# EAGLE board CT_schematic (EAGLE 7.6.0)

Size 100 x 80 mm. Coordinates in mm from the lower left corner, seen from the top.
Outline: 0,0 100,0 100,80 0,80 0,0
Copper layers (1*16): Top 0.035mm / dielectric 1.5mm / Bottom 0.035mm
Design rules "default": minimum track width 10mil, minimum drill 24mil, track to track 8mil, track to pad 8mil, pad to pad 8mil, via to via 8mil, smd to smd 8mil, copper to edge 40mil, drill to drill 8mil, minimum pad ring 10mil, minimum via ring 8mil, stop-mask expansion 4mil, vias tented up to drill 0mil, thermal gap 10mil

## Footprints (pad centres in the part's own frame; a part is rotated, then mirrored left to right if it is on the bottom)
C0603 = smd 0.8 x 0.8: 1 -0.762,0; 2 0.762,0
C0402 = smd 0.5 x 0.5: 1 -0.508,0; 2 0.508,0
C1210 = smd 1.2 x 2.5: 1 -1.524,0; 2 1.524,0
EXV-9H = smd 3.505 x 1.676: 1 -2.857,0; 2 2.857,0
L0603 = smd 0.8 x 0.8: 1 -0.762,0; 2 0.762,0
PJ-037B_PACKAGE = drill 3.7 square: 1 12,0 | drill 3.2 square: 2 6,0
R0603 = smd 0.8 x 0.8: 1 -0.762,0; 2 0.762,0
LQFP48 = smd 0.3 x 1.2: 1 -2.75,-4.25; 2 -2.25,-4.25; 3 -1.75,-4.25; 4 -1.25,-4.25; 5 -0.75,-4.25; 6 -0.25,-4.25; 7 0.25,-4.25; 8 0.75,-4.25; 9 1.25,-4.25; 10 1.75,-4.25; 11 2.25,-4.25; 12 2.75,-4.25; 25 2.75,4.25; 26 2.25,4.25; 27 1.75,4.25; 28 1.25,4.25; 29 0.75,4.25; 30 0.25,4.25; 31 -0.25,4.25; 32 -0.75,4.25; 33 -1.25,4.25; 34 -1.75,4.25; 35 -2.25,4.25; 36 -2.75,4.25 | smd 1.2 x 0.3: 13 4.25,-2.75; 14 4.25,-2.25; 15 4.25,-1.75; 16 4.25,-1.25; 17 4.25,-0.75; 18 4.25,-0.25; 19 4.25,0.25; 20 4.25,0.75; 21 4.25,1.25; 22 4.25,1.75; 23 4.25,2.25; 24 4.25,2.75; 37 -4.25,2.75; 38 -4.25,2.25; 39 -4.25,1.75; 40 -4.25,1.25; 41 -4.25,0.75; 42 -4.25,0.25; 43 -4.25,-0.25; 44 -4.25,-0.75; 45 -4.25,-1.25; 46 -4.25,-1.75; 47 -4.25,-2.25; 48 -4.25,-2.75
TST-110-05-T-D-RA = drill 1 pad 1.7 square: 1 0,0 | drill 1 pad 1.7: 2 0,2.54; 3 2.54,0; 4 2.54,2.54; 5 5.08,0; 6 5.08,2.54; 7 7.62,0; 8 7.62,2.54; 9 10.16,0; 10 10.16,2.54; 11 12.7,0; 12 12.7,2.54; 13 15.24,0; 14 15.24,2.54; 15 17.78,0; 16 17.78,2.54; 17 20.32,0; 18 20.32,2.54; 19 22.86,0; 20 22.86,2.54
AT24C02D = smd 1.6 x 0.6: 1 -2.475,1.905 | smd 1.55 x 0.6: 2 -2.475,0.635; 3 -2.475,-0.635; 4 -2.475,-1.905; 5 2.475,-1.905; 6 2.475,-0.635; 7 2.475,0.635; 8 2.475,1.905
MICRO_USB_AB = smd 0.4 x 1.35: 1 1.3,0.26; 2 0.65,0.26; 3 0,0.26; 4 -0.65,0.26; 5 -1.3,0.26 | drill 0.6 pad 0.95 long: 6 4.175,-2.54; 7 -4.175,-2.54 | drill 0.7 pad 1.1 long: 8 -2.225,0.46; 9 2.225,0.46
SOT143B = smd 1 x 0.7: 1 -0.75,-1 | smd 0.6 x 0.7: 2 0.95,-1; 3 0.95,1; 4 -0.95,1
ASEK = smd 1.4 x 1: 1 -1.1,-0.8; 2 1.1,-0.8; 3 1.1,0.8; 4 -1.1,0.8
ASFL1 = smd 1.7 x 1.5: 1 -1.27,-1.1; 2 1.27,-1.1; 3 1.27,1.1; 4 -1.27,1.1
WSON-8 = smd 0.3 x 0.6: 1 -0.75,0; 2 0.05,0; 3 0.85,0; 4 1.65,0; 5 1.65,3.8; 6 0.85,3.8; 7 0.05,3.8; 8 -0.75,3.8 | smd 3 x 2.6: PAD 0.45,1.9
SON-6 = smd 0.55 x 0.3: 1 -0.355,0.5 | smd 0.52 x 0.3: 2 -0.37,0; 3 -0.37,-0.5; 4 0.37,-0.5; 5 0.37,0; 6 0.37,0.5
SW_4-1437565-2 = smd 1.4 x 2.1: 1 -2.23,4.55; 2 -2.23,-4.55; 3 2.23,4.55; 4 2.23,-4.55
LGM67K-G1J2-24-Z = smd 0.8 x 1.4: A -2,0; C 0,0
NC7SZ125M5X = smd 1.3 x 0.7: 1 -1.3,0.95; 2 -1.3,0; 3 -1.3,-0.95; 4 1.3,-0.95; 5 1.3,0.95
DUMMY_PACKAGE_131 = drill 0.3: 1 0,-1; 2 1.5,-1; 3 3,-1

## Placement (x,y rotation side)
C1  1e-07  [C0603]  -19.05,57.15 0 top  (outside the outline)
C2  1e-07  [C0603]  -22.86,57.15 0 top  (outside the outline)
C3  1e-07  [C0603]  -26.67,57.15 0 top  (outside the outline)
C4  1e-07  [C0603]  -30.48,57.15 0 top  (outside the outline)
C5  4.7e-06  [C0603]  -15.24,57.15 0 top  (outside the outline)
C6  1e-07  [C0603]  -34.29,57.15 0 top  (outside the outline)
C7  1e-08  [C0603]  -38.1,57.15 0 top  (outside the outline)
C8  1e-06  [C0603]  -41.91,57.15 0 top  (outside the outline)
C9  1e-07  [C0402]  -26.67,62.23 0 top  (outside the outline)
C10  1e-07  [C0402]  -30.48,62.23 0 top  (outside the outline)
C11  1e-08  [C0402]  -34.29,62.23 0 top  (outside the outline)
C12  1e-08  [C0402]  -38.1,62.23 0 top  (outside the outline)
C13  1e-08  [C0402]  -41.91,62.23 0 top  (outside the outline)
C14  1e-08  [C0402]  -45.72,62.23 0 top  (outside the outline)
C15  1e-05  [C1210]  -16.51,46.99 0 top  (outside the outline)
C16  1e-05  [C1210]  -22.86,46.99 0 top  (outside the outline)
C17  1e-07  [C0402]  -49.53,62.23 0 top  (outside the outline)
C18  0.0001  [EXV-9H]  -38.1,39.37 0 top  (outside the outline)
C19  0.0001  [EXV-9H]  -49.53,39.37 0 top  (outside the outline)
C20  1e-08  [C0402]  -53.34,62.23 0 top  (outside the outline)
C21  1e-08  [C0402]  -57.15,62.23 0 top  (outside the outline)
F1  240.0  [L0603]  -45.72,57.15 0 top  (outside the outline)
J1  PJ-037B  [PJ-037B_PACKAGE]  -27.94,7.62 0 top  (outside the outline)
R1  10000.0  [R0603]  -55.88,45.72 0 top  (outside the outline)
R2  1000.0  [R0603]  -49.53,57.15 0 top  (outside the outline)
R3  1600.5  [R0603]  -53.34,57.15 0 top  (outside the outline)
R4  4700.0  [R0603]  -57.15,57.15 0 top  (outside the outline)
R5  2200.0  [R0603]  -60.96,57.15 0 top  (outside the outline)
R6  2200.0  [R0603]  -64.77,57.15 0 top  (outside the outline)
R7  10000.0  [R0603]  -60.96,45.72 0 top  (outside the outline)
R8  10000.0  [R0603]  -66.04,45.72 0 top  (outside the outline)
R9  10000.0  [R0603]  -15.24,52.07 0 top  (outside the outline)
R10  10000.0  [R0603]  -20.32,52.07 0 top  (outside the outline)
R11  10000.0  [R0603]  -25.4,52.07 0 top  (outside the outline)
R12  10000.0  [R0603]  -30.48,52.07 0 top  (outside the outline)
R13  10000.0  [R0603]  -35.56,52.07 0 top  (outside the outline)
R14  10000.0  [R0603]  -40.64,52.07 0 top  (outside the outline)
R15  10000.0  [R0603]  -45.72,52.07 0 top  (outside the outline)
R16  10000.0  [R0603]  -50.8,52.07 0 top  (outside the outline)
R17  10000.0  [R0603]  -55.88,52.07 0 top  (outside the outline)
R18  100000.0  [R0603]  -40.64,45.72 0 top  (outside the outline)
R19  2231.0  [R0603]  -15.24,62.23 0 top  (outside the outline)
R20  1000.0  [R0603]  -19.05,62.23 0 top  (outside the outline)
R21  10000.0  [R0603]  -60.96,52.07 0 top  (outside the outline)
R22  10000.0  [R0603]  -66.04,52.07 0 top  (outside the outline)
R23  9100.0  [R0603]  -22.86,62.23 0 top  (outside the outline)
R24  680000.0  [R0603]  -45.72,45.72 0 top  (outside the outline)
R25  120000.0  [R0603]  -50.8,45.72 0 top  (outside the outline)
U1  STM32L152CBT6  [LQFP48]  -24.13,20.32 0 top  (outside the outline)
U2  TST-110-05-T-D-RA  [TST-110-05-T-D-RA]  -64.77,26.67 0 top  (outside the outline)
U3  AT24C02D-SSHM-T  [AT24C02D]  -41.91,19.05 0 top  (outside the outline)
U4  47590-0001  [MICRO_USB_AB]  -36.83,7.62 0 top  (outside the outline)
U5  prtr5v0u2ax  [SOT143B]  -24.13,67.31 0 top  (outside the outline)
U6  ASEK-32.768KHz-ECST  [ASEK]  -29.21,39.37 0 top  (outside the outline)
U7  ASFL1-25MHZ-NCS  [ASFL1]  -26.67,30.48 0 top  (outside the outline)
U8  LP3878SDX-ADJ/NOPB  [WSON-8]  -63.5,17.78 0 top  (outside the outline)
U9  TPS3895ADRYR  [SON-6]  -33.02,66.04 0 top  (outside the outline)
U10  4-1437565-2  [SW_4-1437565-2]  -57.15,6.35 0 top  (outside the outline)
U11  Q65110A2395  [LGM67K-G1J2-24-Z]  -59.69,38.1 0 top  (outside the outline)
U12  nc7sz125m5x  [NC7SZ125M5X]  -27.94,45.72 0 top  (outside the outline)
U13  nc7sz125m5x  [NC7SZ125M5X]  -34.29,45.72 0 top  (outside the outline)
U14  Dummy  [DUMMY_PACKAGE_131]  -30.48,67.31 0 top  (outside the outline)

## Library data of the parts
C1-C21 F1 J1 R1-R25 U1-U14 = circuit_tree

## Nets
CLK_U1_3: U1.3 U6.3
CLK_U1_5: U1.5 U7.3
GND: C1.2 C2.2 C3.2 C4.2 C5.2 C6.2 C7.2 C8.2 C9.2 C10.2 C11.2 C12.2 C13.2 C14.2 C15.2 C16.2 C17.2 C18.2 C19.2 C20.2 C21.2 J1.2 R2.2 R7.2 R13.2 R14.2 R16.2 R17.2 R20.2 R23.2 R25.2 U1.8 U1.23 U1.35 U1.47 U2.4 U2.6 U2.8 U2.10 U2.12 U2.14 U2.16 U2.18 U2.20 U3.4 U4.5 U4.6 U4.7 U4.8 U4.9 U5.1 U6.2 U7.2 U8.3 U8.PAD U9.2 U11.C U12.2 U12.3 U13.1 U13.3 U14.1
NET_U1_1: C6.1 U1.1
NET_U1_7: R4.1 U1.7 U13.4
NET_U1_9: C7.1 C8.1 F1.1 U1.9
NET_U1_42: R5.1 U1.42 U3.6
NET_U1_43: R6.1 U1.43 U3.5
NET_U1_44: R7.1 U1.44
NET_U1_45: R3.1 U1.45 U11.A
NET_U1_46: R1.1 U1.46 U10.3 U10.4
NET_U2_19: R13.1 U2.19
NET_U3_1: R15.1 U3.1
NET_U3_2: R16.1 U3.2
NET_U3_3: R17.1 U3.3
NET_U3_7: R14.1 U3.7
NET_U5_4: U4.1 U5.4
NET_U8_1: C14.1 U8.1
NET_U8_6: R19.2 R20.1 U8.6
NET_U8_8: R18.1 U8.8
NET_U9_1: R22.1 R23.1 U9.1
NET_U9_3: R24.2 R25.1 U9.3
NET_U9_4: R21.1 U9.4 U12.4 U13.2
NET_U10_1: R2.1 U10.1 U10.2
PROC_PC13_WKUP2: U1.2 U14.2
PROC_PC15_OSC32_OUT: U1.4 U14.3
PROC_SYS_JTCK_SWCLK: R11.1 U1.37 U2.9
PROC_SYS_JTDI: R9.1 U1.38 U2.5
PROC_SYS_JTDO_TRACESWO: U1.39 U2.13
PROC_SYS_JTMS_SWDIO: R10.1 U1.34 U2.7
PROC_SYS_JTRST: R8.1 U1.40 U2.3
PROC_USB_DM: U1.32 U4.2 U5.3
PROC_USB_DP: U1.33 U4.3 U5.2
RST_OUT_U2_SRESET_B: R12.1 U2.15 U12.1
VCC_S1_13V8: C15.1 C18.1 C19.1 J1.1 R18.2 U8.4
VCC_TIER1_3V3: C1.1 C2.1 C3.1 C4.1 C5.1 C9.1 C10.1 C11.1 C12.1 C13.1 C16.1 C17.1 C20.1 C21.1 F1.2 R1.2 R3.2 R4.2 R5.2 R6.2 R8.2 R9.2 R10.2 R11.2 R12.2 R15.2 R19.1 R21.2 R22.2 R24.1 U1.24 U1.36 U1.48 U2.1 U2.2 U3.8 U6.4 U7.4 U8.5 U9.6 U12.5 U13.5

## Tracks (layer width: path | path; a pad name or v marks a point on that pad's centre or on a via)
CLK_U1_3  (1 unrouted)
CLK_U1_5  (1 unrouted)
GND  (61 unrouted)
NET_U1_1  (1 unrouted)
NET_U1_7  (2 unrouted)
NET_U1_9  (3 unrouted)
NET_U1_42  (2 unrouted)
NET_U1_43  (2 unrouted)
NET_U1_44  (1 unrouted)
NET_U1_45  (2 unrouted)
NET_U1_46  (3 unrouted)
NET_U2_19  (1 unrouted)
NET_U3_1  (1 unrouted)
NET_U3_2  (1 unrouted)
NET_U3_3  (1 unrouted)
NET_U3_7  (1 unrouted)
NET_U5_4  (1 unrouted)
NET_U8_1  (1 unrouted)
NET_U8_6  (2 unrouted)
NET_U8_8  (1 unrouted)
NET_U9_1  (2 unrouted)
NET_U9_3  (2 unrouted)
NET_U9_4  (3 unrouted)
NET_U10_1  (2 unrouted)
PROC_PC13_WKUP2  (1 unrouted)
PROC_PC15_OSC32_OUT  (1 unrouted)
PROC_SYS_JTCK_SWCLK  (2 unrouted)
PROC_SYS_JTDI  (2 unrouted)
PROC_SYS_JTDO_TRACESWO  (1 unrouted)
PROC_SYS_JTMS_SWDIO  (2 unrouted)
PROC_SYS_JTRST  (2 unrouted)
PROC_USB_DM  (2 unrouted)
PROC_USB_DP  (2 unrouted)
RST_OUT_U2_SRESET_B  (2 unrouted)
VCC_S1_13V8  (5 unrouted)
VCC_TIER1_3V3  (41 unrouted)